# EAGLE board bwv2.1 (EAGLE 8.5.0)
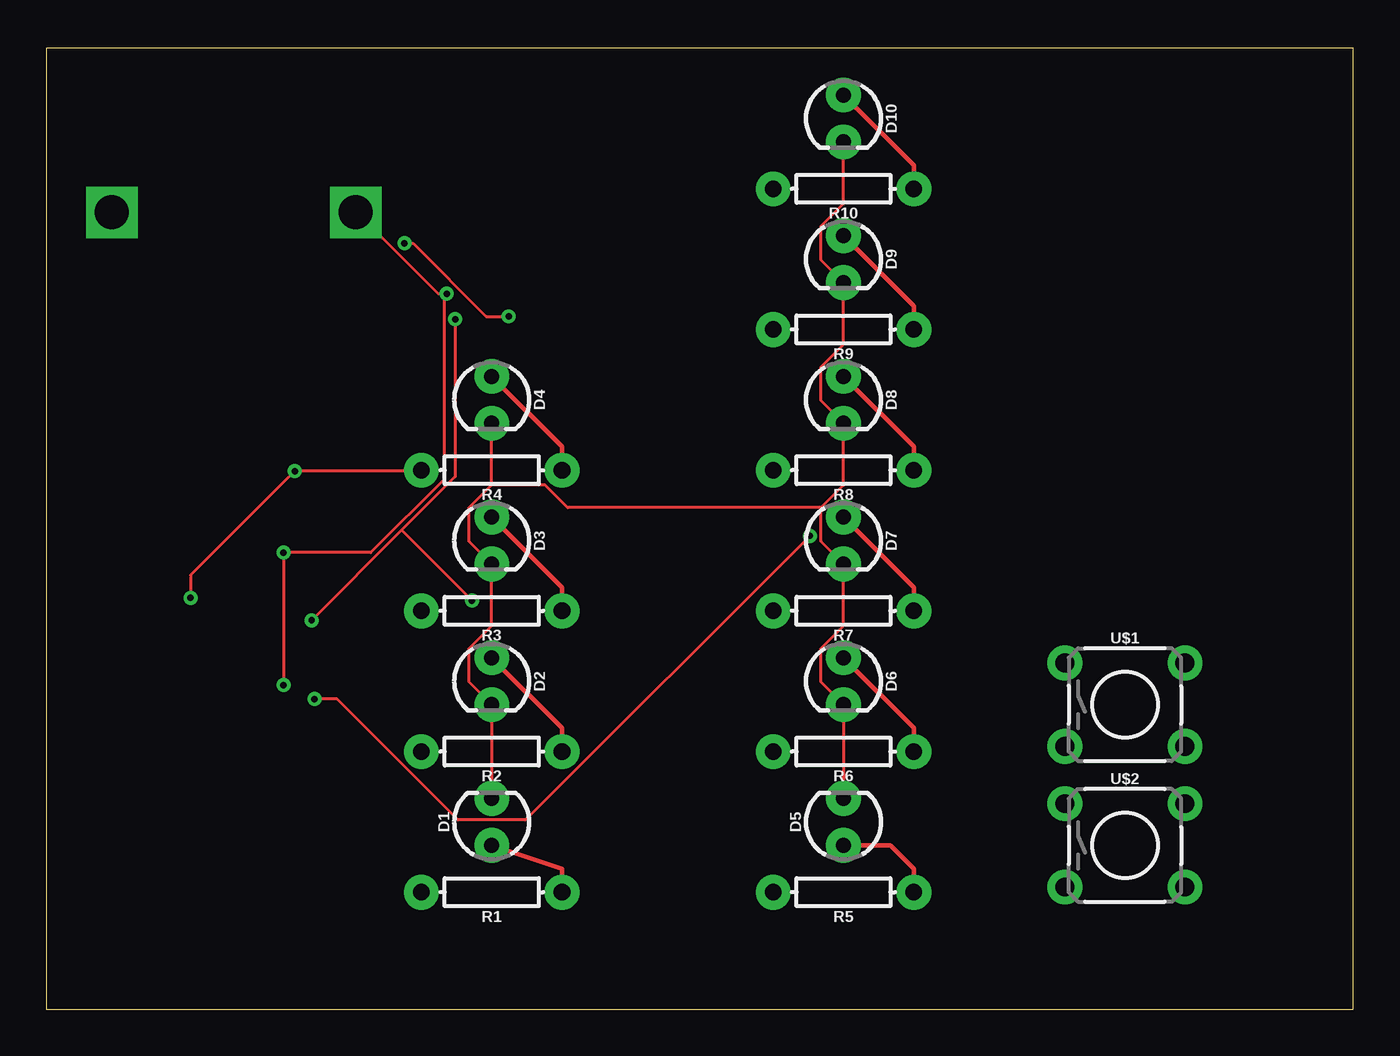
[diagram p0: board, top side]
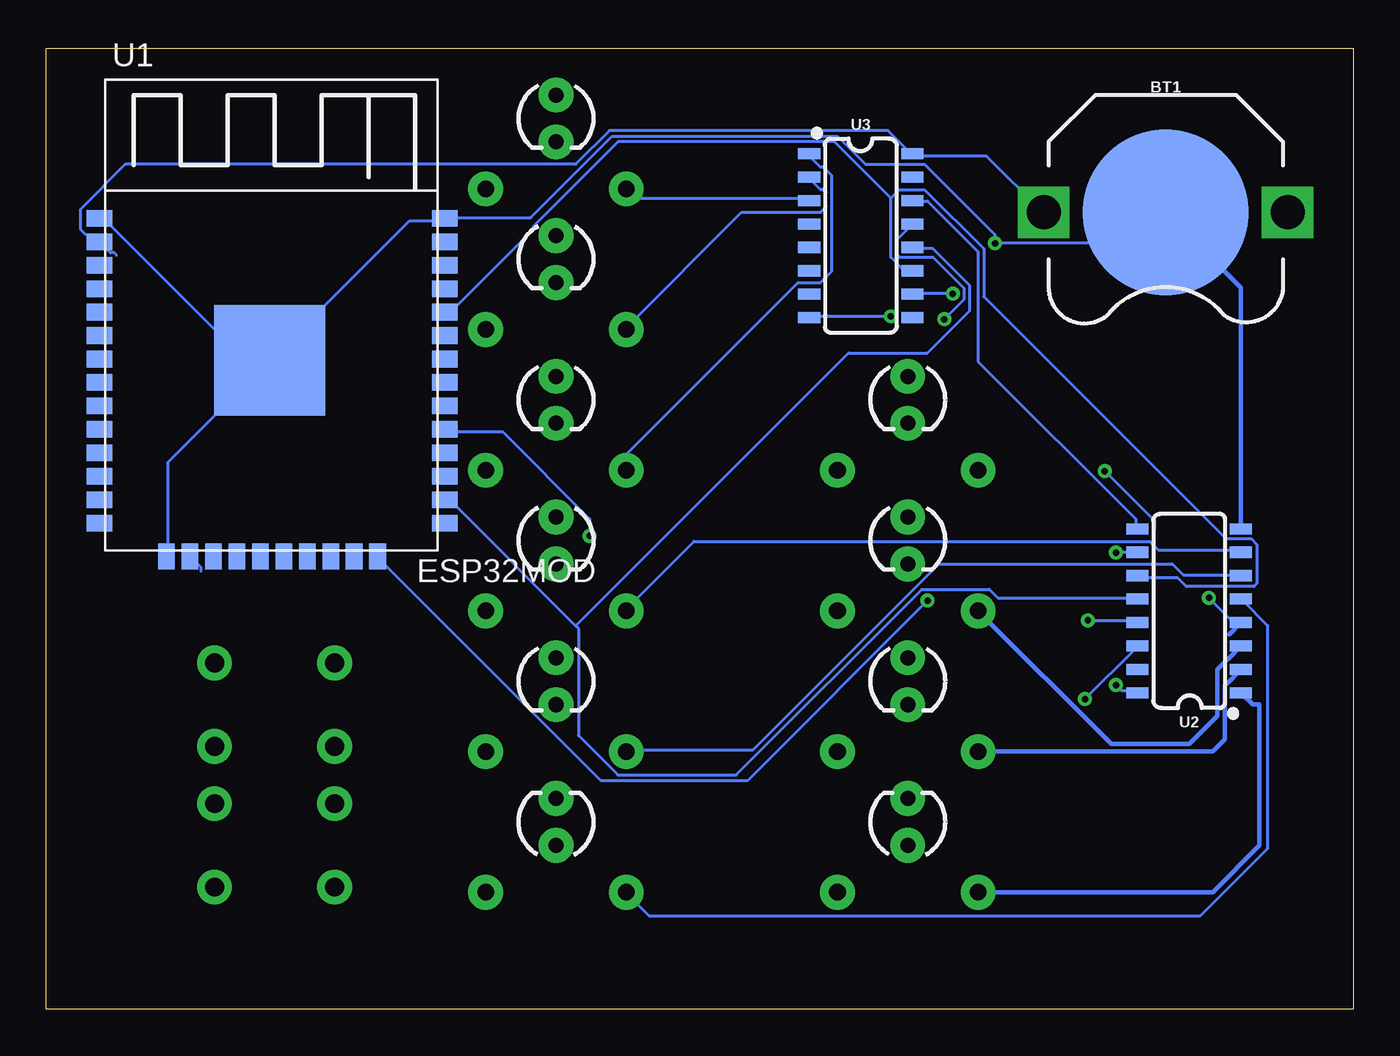
[diagram p1: board, bottom side, seen from below]

Size 70.79 x 52.06 mm. Coordinates in mm from the lower left corner, seen from the top.
Outline: 0,0 70.79,0 70.79,52.06 0,52.06 0,0
Copper layers (1*16): Top 0.035mm / dielectric 1.5mm / Bottom 0.035mm
Design rules "default": minimum track width 6mil, minimum drill 0.35mm, track to track 6mil, track to pad 6mil, pad to pad 6mil, via to via 6mil, smd to smd 6mil, copper to edge 40mil, drill to drill 6mil, minimum pad ring 10mil, minimum via ring 8mil, stop-mask expansion 4mil, vias tented up to drill 0mil, thermal gap 10mil

## Footprints (pad centres in the part's own frame; a part is rotated, then mirrored left to right if it is on the bottom)
BATTCON_12MM_PTH = smd 9 x 9: GND 0,0 | drill 1.854 square: VCC@1 6.604,0; VCC@2 -6.604,0
LED_3MM = drill 0.813 pad 1.88: A -1.27,0; K 1.27,0
AXIAL-0.3 = drill 0.9 pad 1.88: P$1 -3.81,0; P$2 3.81,0
ESP32MOD = smd 6 x 6: 0 9.9,12.3 | smd 1.4 x 0.9: 1 0.68,19.99; 2 0.68,18.72; 3 0.68,17.45; 4 0.68,16.18; 5 0.68,14.91; 6 0.68,13.64; 7 0.68,12.37; 8 0.68,11.1; 9 0.68,9.83; 10 0.68,8.56; 11 0.68,7.29; 12 0.68,6.02; 13 0.68,4.75; 14 0.68,3.48; 25 19.38,3.48; 26 19.38,4.75; 27 19.38,6.02; 28 19.38,7.29; 29 19.38,8.56; 30 19.38,9.83; 31 19.38,11.1; 32 19.38,12.37; 33 19.38,13.64; 34 19.38,14.91; 35 19.38,16.18; 36 19.38,17.45; 37 19.38,18.72; 38 19.38,19.99 | smd 0.9 x 1.4: 15 4.31,1.68; 16 5.58,1.68; 17 6.85,1.68; 18 8.12,1.68; 19 9.39,1.68; 20 10.66,1.68; 21 11.93,1.68; 22 13.2,1.68; 23 14.47,1.68; 24 15.74,1.68
SO16 = smd 0.6 x 1.2: 1 -4.445,-2.8; 2 -3.175,-2.8; 3 -1.905,-2.8; 4 -0.635,-2.8; 5 0.635,-2.8; 6 1.905,-2.8; 7 3.175,-2.8; 8 4.445,-2.8; 9 4.445,2.8; 10 3.175,2.8; 11 1.905,2.8; 12 0.635,2.8; 13 -0.635,2.8; 14 -1.905,2.8; 15 -3.175,2.8; 16 -4.445,2.8
TACTILE_SWITCH_PTH_6.0MM = drill 1.016 pad 1.88: 1 -3.251,2.261; 2 3.251,2.261; 3 -3.251,-2.261; 4 3.251,-2.261

## Placement (x,y rotation side)
BT1  [BATTCON_12MM_PTH]  10.16,43.18 180 bottom
D1  [LED_3MM]  24.13,10.16 90 top
D2  [LED_3MM]  24.13,17.78 270 top
D3  [LED_3MM]  24.13,25.4 270 top
D4  [LED_3MM]  24.13,33.02 270 top
D5  [LED_3MM]  43.18,10.16 90 top
D6  [LED_3MM]  43.18,17.78 270 top
D7  [LED_3MM]  43.18,25.4 270 top
D8  [LED_3MM]  43.18,33.02 270 top
D9  [LED_3MM]  43.18,40.64 270 top
D10  [LED_3MM]  43.18,48.26 270 top
R1  330  [AXIAL-0.3]  24.13,6.35 180 top
R2  330  [AXIAL-0.3]  24.13,13.97 180 top
R3  330  [AXIAL-0.3]  24.13,21.59 180 top
R4  330  [AXIAL-0.3]  24.13,29.21 180 top
R5  330  [AXIAL-0.3]  43.18,6.35 180 top
R6  330  [AXIAL-0.3]  43.18,13.97 180 top
R7  330  [AXIAL-0.3]  43.18,21.59 180 top
R8  330  [AXIAL-0.3]  43.18,29.21 180 top
R9  330  [AXIAL-0.3]  43.18,36.83 180 top
R10  330  [AXIAL-0.3]  43.18,44.45 180 top
U1  ESP32MOD  [ESP32MOD]  68.58,22.86 0 bottom
U2  SN74HC595D  [SO16]  8.89,21.59 90 bottom
U3  SN74HC595D  [SO16]  26.67,41.91 270 bottom
U$1  [TACTILE_SWITCH_PTH_6.0MM]  58.42,16.51 0 top
U$2  [TACTILE_SWITCH_PTH_6.0MM]  58.42,8.89 0 top

## Library data of the parts
BT1 = SparkFun-Batteries; PROD_ID: BATT-08315; SF_SKU: PRT-07948
D1-D10 = SparkFun-LED; PROD_ID: DIO-08794
R1-R10 = SparkFun-Resistors; PROD_ID: RES-8371
U1 = ESP3x
U2 U3 = SparkFun-IC-Logic; PROD_ID: IC-07875
U$1 U$2 = SparkFun-Switches

## Nets
GND: BT1.GND U1.0 U1.1 U1.15 U1.38 U2.8 U3.8
N$2: U1.24 U2.13 U3.13
N$3: U1.26 U2.12 U3.12
N$5: U1.34 U2.11 U3.11
N$6: U1.29 U2.14
N$7: D1.K D2.K D3.K D4.K D5.K D6.K D7.K D8.K D9.K D10.K
N$8: U2.9 U3.14
N$9: D1.A R1.P$1
N$10: R1.P$2 U2.1
N$11: D2.A R2.P$1
N$12: R2.P$2 U2.2
N$13: D6.A R6.P$1
N$14: D3.A R3.P$1
N$15: D4.A R4.P$1
N$16: R3.P$2 U2.3
N$17: R4.P$2 U2.4
N$18: D5.A R5.P$1
N$19: R5.P$2 U2.5
N$20: R6.P$2 U2.6
N$21: R7.P$2 U2.7
N$22: D7.A R7.P$1
N$23: D8.A R8.P$1
N$24: D9.A R9.P$1
N$25: D10.A R10.P$1
N$26: R8.P$2 U3.1
N$27: R9.P$2 U3.2
N$28: R10.P$2 U3.3
N$29: BT1.VCC@1 U1.2 U2.10 U2.16 U3.10 U3.16
N$30: U1.16

## Tracks (layer width: path | path; a pad name or v marks a point on that pad's centre or on a via)
GND  (via drill 0.35)
  Top 0.152: v25.04,37.54 23.82,37.54 19.86,41.5 v19.41,41.5
  Bottom 0.152: v25.04,37.54 29.46,37.54 U3.8 | BT1.GND 10.26,43.18 11.94,41.5 v19.41,41.5 19.41,41.96 23.22,45.77 26.42,45.77 27.94,47.29 40.13,47.29 44.55,42.88 49.12,42.88 U1.38 49.28,42.72 51.11,42.72 58.57,35.26 U1.0 | 59.33,34.49 58.73,35.1 U1.0 | 59.33,34.49 64.21,29.62 64.21,24.59 U1.15 | 59.33,34.49 67.56,42.72 67.87,42.72 U1.1 | 59.33,34.49 U1.0
  Bottom 0.254: U2.8 6.09,39.11 BT1.GND
N$2  (via drill 0.35)
  Top 0.152: 19.25,25.96 22.15,28.85 v22.15,37.39 | 19.25,25.96 v14.38,21.08 | 19.25,25.96 v23.06,22.15
  Bottom 0.152: v14.38,21.08 11.79,21.08 U2.13 | v22.15,37.39 21.08,38.46 21.08,39.07 22.76,40.74 24.59,40.74 24.74,40.89 24.74,41.66 23.98,42.42 U3.13 | v23.06,22.15 32.82,12.4 40.74,12.4 52.78,24.44 U1.24
N$3
  Bottom 0.152: 42.11,20.78 48.82,27.48 49.12,27.48 U1.26 | 42.11,20.78 41.96,20.62 41.96,14.83 39.83,12.7 33.43,12.7 23.37,22.76 19.71,22.76 19.25,22.3 11.79,22.3 U2.12 | 42.11,20.78 27.33,35.56 23.06,35.56 20.78,37.85 20.78,39.22 22.76,41.2 23.82,41.2 U3.12
N$5
  Bottom 0.152: 25.04,43.94 24.59,44.4 23.22,44.4 20.02,41.2 20.02,38.61 6.91,25.5 5.54,25.5 5.23,25.2 5.23,23.06 5.38,22.91 9.04,22.91 9.5,23.37 11.63,23.37 U2.11 | 25.04,43.94 25.04,40.74 24.43,40.13 23.98,40.13 U3.11 | 25.04,43.94 28.09,46.99 39.83,46.99 44.4,42.42 44.4,42.27 48.82,37.85 49.12,37.85 U1.34
N$6  (via drill 0.35)
  Top 0.152: v14.53,16.82 15.75,16.82 22.3,10.26 25.96,10.26 v41.35,25.65
  Bottom 0.152: v14.53,16.82 11.79,19.56 U2.14 | v41.35,25.65 41.35,26.57 46.08,31.29 49.12,31.29 U1.29
N$7
  Top 0.152: D1.K D2.K 22.91,17.73 22.91,19.56 24.13,20.78 D3.K 22.91,25.35 22.91,27.18 24.13,28.4 | 24.13,28.4 D4.K | D5.K D6.K 41.96,17.73 41.96,19.56 43.18,20.78 D7.K 41.96,25.35 41.96,27.18 | 41.96,27.18 43.18,28.4 D8.K 41.96,32.97 41.96,34.8 43.18,36.02 D9.K 41.96,40.59 41.96,42.42 43.18,43.64 D10.K | 24.13,28.4 27.03,28.4 28.25,27.18 41.96,27.18
N$8
  Bottom 0.152: U2.9 11.79,26.11 11.79,26.57 20.32,35.1 20.32,41.05 23.06,43.79 23.82,43.79 U3.14
N$9
  Top 0.254: D1.A 27.94,7.62 R1.P$1
N$10
  Bottom 0.254: R1.P$2 7.62,6.35 5.08,8.89 5.08,16.51 5.46,16.51 U2.1
N$11
  Top 0.254: D2.A 27.94,15.24 R2.P$1
N$12
  Bottom 0.254: R2.P$2 7.62,13.97 6.97,14.62 6.97,17.56 6.81,17.72 6.78,17.72 U2.2
N$13
  Top 0.254: D6.A 46.99,15.24 R6.P$1
N$14
  Top 0.254: D3.A 27.94,22.86 R3.P$1
N$15
  Top 0.254: D4.A 27.94,30.48 R4.P$1
N$16
  Bottom 0.254: R3.P$2 13.11,14.38 8.89,14.38 7.38,15.89 7.38,18.42 6.81,18.99 6.78,18.99 U2.3
N$17  (via drill 0.35)
  Top 0.152: R4.P$2 20.32,29.16 v13.46,29.16 7.82,23.52 v7.82,22.3
  Bottom 0.152: v13.46,29.16 10.87,26.57 10.81,26.45 | v7.82,22.3 6.3,20.78 U2.4
  Bottom 0.254: 10.81,26.45 10.81,26.05 | 6.73,20.32 U2.4
N$18
  Top 0.254: D5.A 45.72,8.89 46.99,7.62 R5.P$1
N$19
  Bottom 0.152: U2.5 5.99,22.15 4.62,20.78 4.62,8.74 8.28,5.08 38.15,5.08 39.37,6.3 R5.P$2
N$20
  Bottom 0.152: U2.6 6.15,23.52 9.2,23.52 9.8,24.13 22.45,24.13 32.51,14.07 39.37,14.07 R6.P$2
N$21
  Bottom 0.152: U2.7 6.15,24.89 10.57,24.89 11.02,25.35 35.71,25.35 39.37,21.69 R7.P$2
N$22
  Top 0.254: D7.A 46.99,22.86 R7.P$1
N$23
  Top 0.254: D8.A 46.99,30.48 R8.P$1
N$24
  Top 0.254: D9.A 46.99,38.1 R9.P$1
N$25
  Top 0.254: D10.A 46.99,45.72 R10.P$1
N$26
  Bottom 0.152: R8.P$2 39.37,30.07 30.07,39.37 28.85,39.37 28.25,39.98 28.25,45.16 28.7,45.62 28.85,45.62 29.46,46.23 U3.1
N$27
  Bottom 0.152: U3.2 29.46,45.01 28.85,44.4 28.7,44.4 28.55,44.25 28.55,43.49 28.85,43.18 33.12,43.18 39.37,36.93 R9.P$2
N$28
  Bottom 0.152: U3.3 29.62,43.94 38.91,43.94 39.37,44.4 R10.P$2
N$29  (via drill 0.35)
  Top 0.152: v12.85,17.58 v12.85,24.74 17.58,24.74 21.54,28.7 21.54,38.76 | 21.54,38.76 21.23,38.76 16.82,43.18 BT1.VCC@1 | 21.54,38.76 v21.69,38.76
  Bottom 0.152: v12.85,17.58 12.55,17.27 11.79,17.27 U2.16 | v12.85,24.74 11.79,24.74 U2.10 | v21.69,38.76 23.82,38.76 U3.10 | BT1.VCC@1 16.82,43.18 19.86,46.23 23.82,46.23 U3.16 23.98,46.38 25.2,47.6 40.28,47.6 42.11,45.77 66.5,45.77 68.94,43.33 68.94,42.27 68.33,41.66 68.02,41.66 U1.2 67.31,40.99 67.11,40.99 66.97,40.85
N$30
  Bottom 0.152: 62.41,23.75 62.41,23.95 U1.16